# Altium PCB ISO-ASS[3]-VB-RC1.PcbDoc (part 2 of 3)
Units mm, origin at the board's own origin, x right, y up, seen from the top; angles counter-clockwise.
Board outline 300 x 85 mm, 4 copper layers (Top Layer, MidLayer1, MidLayer2, Bottom Layer); 157 components, 49 nets, 745 pads, 270 vias.
Unrouted connection lines stored in the file: 15.
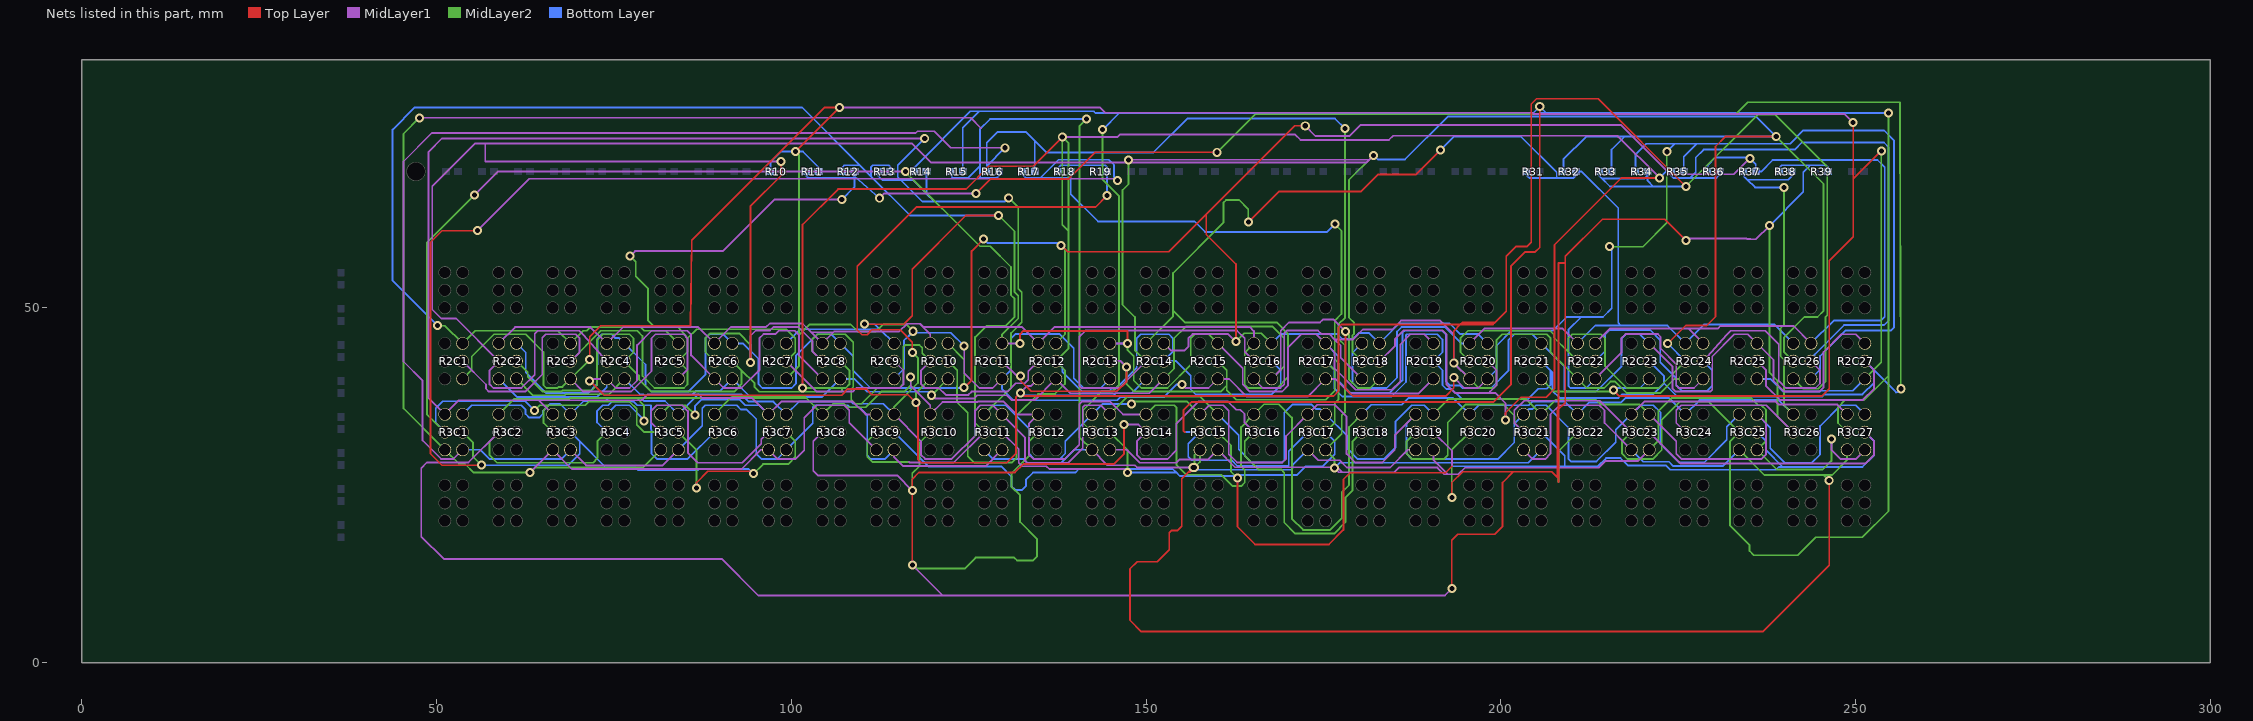
[diagram p4: the nets of this part, all layers, seen from the top]

## Via types
v1: diameter 1.27, hole 0.711, Top Layer to Bottom Layer, 270 vias

## Nets (pads, with @x,y where several pads share a name; then routed paths per layer and width w, separated by ;. In a path a pad name is that pad's centre, name@x,y a point inside that pad or via, vN(x,y) a via of type N, cw(c..) or ccw(c..) an arc to the next point about the centre after c; other vN are vias at no path point) (continued)
NetR2C1_4: R2C1.4 R2C3.4 R2C5.4 R2C7.4 R2C9.4 R2C11.4 R2C13.4 R2C15.4 R2C17.4 R2C19.4 R2C21.4 R2C23.4 R2C25.4 R2C27.4 R12.2 R13.2 | length 496.1
  Top Layer w0.254: v1(110.363,47.701) 115.849,47.701 117.069,48.92 117.069,55.474 124.638,63.043 v1(129.21,63.043) ; v1(132.258,45) 132.258,46.304 132.715,46.761 147.413,46.761 v1(147.413,45)
  MidLayer1 w0.254: R2C11.4@129.7,45 v1(132.258,45) ; R2C13.4@144.9,45 v1(147.413,45) ; R2C15.4@160.1,45 163.627,41.473 163.627,39.218 164.633,38.211 169.164,38.211 169.997,39.044 169.997,44.387 171.9,46.29 174.01,46.29 R2C17.4@175.3,45 176.581,43.719 176.581,41.462 179.578,38.465 184.658,38.465 185.815,39.622 185.815,44.845 187.251,46.281 189.219,46.281 R2C19.4@190.5,45 ; R2C23.4@220.9,45 224.206,41.694 224.206,38.633 224.638,38.202 229.514,38.202 229.794,38.481 229.794,43.157 232.918,46.281 234.819,46.281 R2C25.4@236.1,45 238.43,42.67 238.43,39.726 239.944,38.211 244.856,38.211 245.491,38.846 245.491,43.79 247.982,46.281 250.019,46.281 R2C27.4@251.3,45
  MidLayer2 w0.254: v1(50.19,47.494) 51.206,47.494 R2C1.4@53.7,45 55.489,46.789 67.111,46.789 R2C3.4@68.9,45 70.689,46.789 71.195,46.789 71.703,47.297 78.797,47.297 79.305,46.789 82.311,46.789 R2C5.4@84.1,45 ; v1(129.21,63.043) 131.489,60.764 131.489,52.222 131.997,51.714 131.997,48.506 129.7,46.208 R2C11.4@129.7,45 ; v1(147.413,45) 147.413,44.052 148.285,43.18 148.285,39.776 149.352,38.71 153.035,38.71 156.319,41.994 156.319,45.72 156.88,46.281 158.819,46.281 R2C15.4@160.1,45
  Bottom Layer w0.254: v1(50.19,47.494) 43.84,53.844 43.84,75.133 46.965,78.257 101.524,78.257 109.677,70.104 ; R2C7.4@99.3,45 101.29,46.99 110.363,46.99 112.51,46.99 ; R12.2@107.227,69.215 107.227,69.85 107.481,70.104 109.677,70.104 ; v1(110.363,47.701) 111.799,47.701 112.51,46.99 ; R13.2@114.007,69.215 114.007,69.85 113.753,70.104 111.495,70.104 111.241,69.85 111.241,68.54 ; v1(129.21,63.043) 116.738,63.043 ; R2C13.4@144.9,45 v1(147.413,45) ; R2C17.4@175.3,45 177.089,43.211 177.089,39.733 178.798,38.024 184.364,38.024 186.131,39.79 186.131,46.484 186.436,46.789 191.728,46.789 192.289,46.228 192.289,39.624 192.83,39.083 194.222,39.083 194.586,38.719 198.631,38.719 201.072,41.16 201.072,45.423 201.93,46.281 204.419,46.281 R2C21.4@205.7,45 208.991,41.709 208.991,38.506 209.296,38.202 213.411,38.202 217.018,41.808 217.018,45.72 217.602,46.304 219.596,46.304 R2C23.4@220.9,45 ; 109.677,70.104 111.241,68.54 ; 109.677,70.104 111.241,68.54 ; 111.241,68.54 116.738,63.043 ; 111.241,68.54 116.738,63.043 ; 111.241,68.54 116.738,63.043 ; 112.51,46.99 R2C9.4@114.5,45 112.51,46.99
NetR2C1_5: R2C1.5 R2C3.5 R2C5.5 R2C7.5 R2C9.5 R2C11.5 R2C13.5 R2C15.5 R2C17.5 R2C19.5 R2C21.5 R2C23.5 R2C25.5 R2C27.5 R11.1 R12.1 | length 582.7
  Top Layer w0.254: v1(126.06,66.142) 128.067,68.148 139.065,68.148 142.85,71.933 v1(160.02,71.933) ; v1(132.283,40.437) 132.283,39.776 133.807,38.252 145.898,38.252 147.269,39.624 v1(147.269,41.656)
  MidLayer1 w0.254: R2C1.5@53.7,42.5 56.998,39.202 56.998,38.608 57.395,38.211 62.52,38.211 64.922,40.613 64.922,45.796 65.407,46.281 69.62,46.281 70.181,45.72 70.181,43.781 R2C3.5@68.9,42.5 ; v1(77.292,57.302) 78.003,58.014 90.373,58.014 97.618,65.258 v1(107.129,65.258) ; R2C7.5@99.3,42.5 103.589,38.211 108.689,38.211 109.188,38.71 115.316,38.71 115.824,39.218 115.824,41.176 R2C9.5@114.5,42.5 ; v1(112.446,65.456) 113.132,66.142 v1(126.06,66.142) ; R2C11.5@129.7,42.5 131.763,40.437 v1(132.283,40.437) ; R2C13.5@144.9,42.5 146.425,42.5 v1(147.269,41.656) ; R2C25.5@236.1,42.5 237.388,41.212 237.388,38.989 239.344,37.033 251.028,37.033 252.603,38.608 252.603,41.197 R2C27.5@251.3,42.5
  MidLayer2 w0.254: R2C3.5@68.9,42.5 73.189,46.789 78.289,46.789 79.045,46.033 79.045,40.411 80.737,38.719 84.896,38.719 85.395,39.218 85.395,41.205 R2C5.5@84.1,42.5 85.395,43.795 85.395,45.72 ; v1(77.292,57.302) 78.105,56.49 78.105,54.483 79.807,52.781 79.807,48.26 80.77,47.297 84.072,47.297 85.395,45.72 ; R2C7.5@99.3,42.5 100.581,43.781 100.581,45.72 99.311,46.99 86.665,46.99 85.395,45.72 ; v1(147.269,41.656) 147.269,39.268 148.336,38.202 160.528,38.202 161.392,39.065 ; v1(160.02,71.933) 165.379,77.292 233.121,77.292 234.823,78.994 256.235,78.994 v1(256.362,38.608) ; R2C15.5@160.1,42.5 161.366,41.234 161.366,40.284 161.392,40.259 ; R2C17.5@175.3,42.5 176.606,41.194 176.606,38.354 175.311,37.059 162.73,37.059 161.392,38.397 161.392,39.065 ; 161.392,39.065 161.392,40.259 ; 161.392,39.065 161.392,40.259
  Bottom Layer w0.254: R11.1@102.147,69.215 102.147,68.58 102.401,68.326 108.673,68.326 108.927,68.58 ; v1(107.129,65.258) 108.927,67.056 108.927,68.58 ; v1(112.446,65.456) 108.927,68.58 ; R2C13.5@144.9,42.5 146.425,42.5 v1(147.269,41.656) ; R2C17.5@175.3,42.5 176.581,41.219 176.581,38.608 177.675,37.514 184.593,37.514 186.639,39.561 186.639,46.205 186.715,46.281 191.031,46.281 191.781,45.531 191.781,43.781 R2C19.5@190.5,42.5 191.781,41.219 191.781,39.116 192.34,38.557 193.116,38.557 194.539,37.135 203.784,37.135 205.257,38.608 206.477,38.608 206.985,39.116 206.985,41.215 ; R2C23.5@220.9,42.5 223.012,40.388 223.012,39.345 ; v1(256.362,38.608) 256.362,38.203 255.7,38.1 252.603,41.197 ; 108.927,68.58 R12.1@108.927,69.215 108.927,68.58 ; 206.985,41.215 R2C21.5@205.7,42.5 206.985,41.215 ; 206.985,41.215 207.264,40.936 207.264,38.329 208.28,37.313 216.586,37.313 217.094,37.821 221.488,37.821 223.012,39.345 ; 223.012,39.345 224.841,37.516 245.314,37.516 245.603,37.805 250.952,37.805 252.603,39.456 252.603,41.197 ; 252.603,41.197 R2C27.5@251.3,42.5 252.603,41.197
NetR2C1_6: R2C1.6 R2C3.6 R2C5.6 R2C7.6 R2C9.6 R2C11.6 R2C13.6 R2C15.6 R2C17.6 R2C19.6 R2C21.6 R2C23.6 R2C25.6 R2C27.6 R10.2 R11.2 | length 608.9
  Top Layer w0.254: v1(71.603,42.703) 71.603,45.923 73.152,47.473 85.827,47.473 85.979,59.538 104.673,78.232 v1(106.782,78.232) v1(100.584,72.034) ; v1(215.849,38.43) 216.713,37.567 245.237,37.567 246.278,38.608 246.278,56.642 249.657,60.02 ; v1(249.657,76.098) 249.657,68.174 ; v1(253.619,72.136) 249.657,68.174 ; 249.657,60.02 249.657,68.174 ; 249.657,60.02 249.657,68.174
  MidLayer1 w0.254: R2C3.6@68.9,40 70.698,38.202 77.426,38.202 80.319,41.094 80.319,45.72 80.88,46.281 84.836,46.281 85.381,45.736 85.381,41.281 R2C5.6@84.1,40 ; v1(106.782,78.232) 143.535,78.232 144.272,77.495 204.47,77.495 204.622,77.343 248.412,77.343 v1(249.657,76.098) ; v1(124.384,44.628) 124.384,40.818 126.492,38.71 128.41,38.71 R2C11.6@129.7,40 ; v1(155.067,39.218) 155.575,38.71 158.81,38.71 R2C15.6@160.1,40 161.695,40 164.193,37.502 172.802,37.502 R2C17.6@175.3,40 176.662,40 178.714,37.948 188.448,37.948 R2C19.6@190.5,40
  MidLayer2 w0.254: R2C1.6@53.7,40 54.991,41.291 54.991,43.155 58.117,46.281 62.586,46.281 65.1,43.766 65.1,39.116 65.507,38.71 67.069,38.71 67.221,38.862 67.762,38.862 R2C3.6@68.9,40 v1(71.603,42.703) ; R2C7.6@99.3,40 101.089,41.789 ; v1(100.584,72.034) 101.089,71.529 101.089,46.152 ; v1(117.17,46.711) 116.205,47.676 112.991,47.676 112,46.685 109.347,46.685 108.356,47.676 102.613,47.676 101.089,46.152 ; R2C21.6@205.7,40 207.489,38.211 215.63,38.211 v1(215.849,38.43) ; R2C27.6@251.3,40 253.619,42.319 v1(253.619,72.136) ; 101.089,41.789 101.089,46.152 ; 101.089,41.789 101.089,46.152
  Bottom Layer w0.254: R10.2@97.067,69.215 97.067,70.549 98.552,72.034 v1(100.584,72.034) 101.663,72.034 103.847,69.85 R11.2@103.847,69.215 ; R2C9.6@114.5,40 115.9,41.4 115.9,45.441 ; v1(117.17,46.711) 115.9,45.441 ; v1(124.384,44.628) 122.504,46.507 117.17,46.507 115.9,45.441 ; R2C13.6@144.9,40 143.61,38.71 141.224,38.71 139.827,40.107 139.827,44.331 137.854,46.304 131.572,46.304 130.988,45.72 130.988,41.288 R2C11.6@129.7,40 129.7,38.587 131.305,36.982 145.948,36.982 146.431,37.465 152.585,37.465 154.338,39.218 v1(155.067,39.218) ; v1(215.849,38.43) 216.129,38.71 219.61,38.71 R2C23.6@220.9,40 ; R2C25.6@236.1,40 237.978,40 239.776,38.202 244.932,38.202 245.044,38.313 249.613,38.313 R2C27.6@251.3,40
NetR2C2_1: R2C2.1 R2C4.1 R2C6.1 R2C8.1 R2C10.1 R2C12.1 R2C14.1 R2C16.1 R2C18.1 R2C20.1 R2C22.1 R2C24.1 R2C26.1 R31.1 R32.2 | length 385.1
  Top Layer w0.254: v1(164.414,62.078) 168.732,66.396 180.289,66.396 182.702,68.809 188.062,68.809 v1(191.491,72.238)
  MidLayer1 w0.254: R2C2.1@58.8,45 61.097,47.297 71.703,47.297 R2C4.1@74,45 76.297,47.297 86.903,47.297 R2C6.1@89.2,45 91.52,47.32 96.495,47.32 96.979,47.805 101.595,47.805 102.819,46.581 ; R2C10.1@119.6,45 119.6,46.262 118.085,47.777 ; R2C16.1@165.2,45 165.2,46.736 164.616,47.32 137.12,47.32 R2C12.1@134.8,45 132.48,47.32 118.618,47.32 118.161,47.777 118.085,47.777 ; R2C20.1@195.6,45 197.717,47.117 208.683,47.117 R2C22.1@210.8,45 ; 102.819,46.581 106.008,46.608 ; 102.819,46.581 R2C8.1@104.4,45 106.008,46.608 ; 106.008,46.608 115.24,46.685 ; 106.008,46.608 106.085,46.685 115.24,46.685 ; 115.24,46.685 116.332,47.777 ; 116.332,47.777 118.085,47.777 ; 116.332,47.777 118.085,47.777
  MidLayer2 w0.254: R2C14.1@150,45 153.822,48.822 153.822,49.581 ; v1(164.414,62.078) 164.414,63.932 163.144,65.202 161.29,65.202 160.909,64.821 160.909,62.001 153.822,54.915 ; R2C16.1@165.2,45 163.906,43.706 163.906,39.192 164.379,38.719 168.513,38.719 170.002,40.208 170.002,46.357 168.404,47.955 155.448,47.955 153.822,49.581 ; 153.822,49.581 153.822,54.915 ; 153.822,49.581 153.822,54.915
  Bottom Layer w0.254: R2C18.1@180.4,45 179.119,43.719 179.119,39.423 179.832,38.71 183.896,38.71 185.369,40.183 185.369,46.66 186.006,47.297 192.151,47.297 194.448,45 R2C20.1@195.6,45 ; v1(191.491,72.238) 193.37,74.117 202.844,74.117 207.874,69.088 207.874,68.326 ; R31.1@203.747,69.215 203.747,68.58 204.001,68.326 207.874,68.326 ; R2C22.1@210.8,45 213.323,47.523 216.916,47.523 ; R2C26.1@241.2,45 238.524,47.676 228.676,47.676 R2C24.1@226,45 223.477,47.523 ; 207.874,68.326 210.273,68.326 ; 207.874,68.326 210.273,68.326 ; 210.273,68.326 R32.2@210.527,69.215 ; 210.273,68.326 210.527,68.58 R32.2@210.527,69.215 ; R32.2@210.527,69.215 211.404,69.215 216.535,64.084 216.535,47.904 216.916,47.523 ; 216.916,47.523 223.477,47.523 ; 216.916,47.523 223.477,47.523
NetR2C2_2: R2C2.2 R2C4.2 R2C6.2 R2C8.2 R2C10.2 R2C12.2 R2C14.2 R2C16.2 R2C18.2 R2C20.2 R2C22.2 R2C24.2 R2C26.2 R32.1 R33.2 | length 818.5
  Top Layer w0.254: v1(94.259,42.291) 94.259,64.338 98.577,68.656 v1(98.577,70.612) ; v1(223.52,44.98) 226.063,47.523 229.006,47.523 230.251,48.768 230.251,72.746 231.648,74.143 v1(238.811,74.143)
  MidLayer1 w0.254: R2C4.2@74,42.5 70.689,46.228 70.128,46.789 64.266,46.789 63.856,46.379 63.856,40.589 61.985,38.719 58.004,38.719 57.506,39.218 57.506,41.206 R2C2.2@58.8,42.5 52.79,48.51 50.677,48.51 49.411,49.776 49.411,67.166 55.397,73.152 56.896,73.152 ; v1(94.259,42.291) 94.259,46.037 95.034,46.812 97.003,46.812 97.487,47.297 101.036,47.297 102.997,45.336 102.997,43.903 R2C8.2@104.4,42.5 ; v1(98.577,70.612) 56.896,70.612 56.896,73.152 ; R2C10.2@119.6,42.5 118.313,41.213 118.313,39.268 118.872,38.71 120.802,38.71 121.768,37.744 124.968,37.744 125.425,38.202 130.48,38.202 131.674,39.395 132.918,39.395 133.401,39.878 133.401,41.101 R2C12.2@134.8,42.5 ; v1(147.535,70.866) 181.432,70.866 ; R2C14.2@150,42.5 146.21,38.71 140.894,38.71 140.589,39.014 140.589,45.917 141.484,46.812 162.814,46.812 163.906,45.72 163.906,43.794 R2C16.2@165.2,42.5 ; 56.896,73.152 117.069,73.152 ; 56.896,73.152 117.069,73.152 ; 117.069,73.152 119.736,70.485 147.535,70.485 181.051,70.485 181.432,70.866 ; 181.432,70.866 v1(182.067,71.501) 181.432,70.866
  MidLayer2 w0.254: R2C6.2@89.2,42.5 87.909,43.791 87.909,45.72 88.595,46.406 92.685,46.406 94.259,44.831 v1(94.259,42.291) ; R2C8.2@104.4,42.5 102.921,43.979 102.921,45.491 103.71,46.281 107.62,46.281 108.745,45.156 108.745,38.856 108.458,38.569 108.458,37.084 109.042,36.5 109.906,36.5 112.125,38.719 115.224,38.719 115.799,39.294 115.799,44.501 116.053,44.755 118.085,44.755 118.466,44.374 118.466,43.634 R2C10.2@119.6,42.5 ; v1(147.535,70.866) 147.535,67.449 146.689,66.603 146.689,50.466 148.438,48.717 148.438,44.062 R2C14.2@150,42.5 ; R2C18.2@180.4,42.5 179.095,43.805 179.095,46.157 179.324,46.385 179.324,47.909 178.611,48.622 178.611,68.045 v1(182.067,71.501) ; R2C20.2@195.6,42.5 194.31,43.79 194.31,45.72 195.379,46.789 206.928,46.789 207.489,46.228 207.489,45.811 209.499,43.801 ; R2C24.2@226,42.5 222.219,38.719 217.743,38.719 214.681,41.781 214.681,45.72 214.12,46.281 210.06,46.281 209.499,45.72 209.499,43.801 ; v1(238.811,74.143) 245.491,67.462 245.491,49.581 244.627,48.717 242.773,48.717 239.919,45.863 239.919,43.781 R2C26.2@241.2,42.5 ; 209.499,43.801 R2C22.2@210.8,42.5 209.499,43.801
  Bottom Layer w0.254: v1(182.067,71.501) 182.651,70.917 186.487,70.917 192.532,76.962 235.991,76.962 v1(238.811,74.143) ; R32.1@208.827,69.215 208.827,70.924 212.046,74.143 217.424,74.143 ; R33.2@215.607,69.215 215.607,72.326 217.424,74.143 ; v1(223.52,44.98) R2C24.2@226,42.5 ; 217.424,74.143 v1(238.811,74.143) ; 217.424,74.143 v1(238.811,74.143)
NetR2C2_3: R2C2.3 R2C4.3 R2C6.3 R2C8.3 R2C10.3 R2C12.3 R2C14.3 R2C16.3 R2C18.3 R2C20.3 R2C22.3 R2C24.3 R2C26.3 R33.1 R34.2 | length 524.2
  Top Layer w0.254: v1(71.603,39.726) 73.635,37.694 107.112,37.694 108.001,38.583 110.566,38.583 111.379,37.77 116.459,37.77 ; v1(193.37,42.23) 193.37,46.736 194.31,47.676 ; v1(226.085,67.107) 213.716,79.477 205.029,79.477 204.292,78.74 204.292,59.258 203.708,58.674 202.184,58.674 200.762,57.252 200.762,49.555 ; 116.459,37.77 v1(117.577,36.652) ; 116.459,37.77 v1(117.577,36.652) ; v1(117.577,36.652) v1@117.856,36.373 ; v1(117.577,36.652) v1@117.856,36.373 ; v1@117.856,36.373 117.856,28.702 118.364,28.194 130.404,28.194 131.674,29.464 131.674,37.414 v1(132.283,38.024) 132.283,37.592 176.428,37.592 177.114,38.278 177.114,47.244 177.546,47.676 194.31,47.676 ; 194.31,47.676 194.564,47.93 199.136,47.93 ; 194.31,47.676 198.882,47.676 199.136,47.93 ; 199.136,47.93 200.762,49.555 ; 199.136,47.93 200.762,49.555
  MidLayer1 w0.254: v1(71.603,39.726) 71.877,40 R2C4.3@74,40 75.29,38.71 77.216,38.71 78.283,39.776 78.283,44.753 80.319,46.789 85.344,46.789 85.889,46.244 85.889,43.311 R2C6.3@89.2,40 90.49,38.71 92.989,38.71 95.519,41.239 95.519,45.72 96.103,46.304 97.753,46.304 98.238,46.789 100.528,46.789 101.089,46.228 101.089,43.311 R2C8.3@104.4,40 ; v1(132.283,38.024) 133.274,39.014 133.814,39.014 R2C12.3@134.8,40 ; R2C16.3@165.2,40 166.481,38.719 168.94,38.719 169.489,39.268 169.489,46.426 169.875,46.812 174.219,46.812 174.701,46.33 175.819,46.33 ; R2C18.3@180.4,40 177.444,42.956 177.444,44.704 176.606,45.542 ; R2C20.3@195.6,40 v1(193.37,42.23) 193.37,46.279 191.44,48.209 185.937,48.209 184.687,46.96 180.543,46.96 179.126,45.542 176.606,45.542 ; 175.819,46.33 176.606,45.542 ; 175.819,46.33 176.606,45.542
  MidLayer2 w0.254: v1(117.577,36.652) 117.577,37.977 R2C10.3@119.6,40 ; v1(193.37,42.23) R2C20.3@195.6,40 196.881,38.719 198.984,38.719 199.381,39.116 199.381,45.434 200.228,46.281 206.471,46.281 206.981,45.771 206.981,43.819 R2C22.3@210.8,40 212.081,38.719 214.554,38.719 215.459,39.624 216.119,39.624 217.713,38.031 222.509,38.031 224.478,40 R2C24.3@226,40 ; v1(226.085,67.107) 236.195,77.216 238.684,77.216 245.999,69.901 245.999,48.946 245.745,48.692 245.745,39.624 244.729,38.608 242.592,38.608 R2C26.3@241.2,40
  Bottom Layer w0.254: R2C2.3@58.8,40 61.348,37.452 72.648,37.452 74,38.804 R2C4.3@74,40 ; v1(132.283,38.024) 132.613,37.694 145.44,37.694 145.72,37.973 147.973,37.973 R2C14.3@150,40 ; R33.1@213.907,69.215 213.907,68.58 ; 213.907,68.58 214.237,68.25 ; 213.907,68.58 214.237,68.25 ; 214.237,68.25 220.243,68.25 220.687,68.693 ; 214.237,68.25 215.38,67.107 221.488,67.107 ; 220.687,68.693 R34.2@220.687,69.215 220.687,68.693 ; 220.687,68.693 220.687,67.908 221.488,67.107 ; 221.488,67.107 v1(226.085,67.107) 221.488,67.107
NetR2C2_4: R2C2.4 R2C4.4 R2C6.4 R2C8.4 R2C10.4 R2C12.4 R2C14.4 R2C16.4 R2C18.4 R2C20.4 R2C22.4 R2C24.4 R2C26.4 R36.1 R37.2 | length 466.1
  Top Layer w0.254: v1(124.384,38.76) 125.425,39.802 125.425,58.014 v1(127.127,59.715) ; v1(138.049,58.826) 138.963,57.912 153.197,57.912 158.496,63.211 ; v1(162.662,45.237) 162.662,56.185 158.496,60.35 158.496,63.211 ; v1(172.441,75.667) 170.951,75.667 ; 158.496,63.211 170.951,75.667 ; 158.496,63.211 170.951,75.667
  MidLayer1 w0.254: R2C14.4@152.5,45 153.482,44.018 155.448,44.018 155.981,44.552 155.981,45.72 156.566,46.304 161.595,46.304 v1(162.662,45.237) ; v1(172.441,75.667) 173.888,74.219 178.664,74.219 180.213,75.768 216.967,75.768 223.901,68.834 232.842,68.834 v1(235.09,71.082) ; R2C22.4@213.3,45 215.417,47.117 ; R2C24.4@228.5,45 226.383,47.117 ; R2C26.4@243.7,45 241.24,47.46 230.96,47.46 230.617,47.117 226.383,47.117 ; 215.417,47.117 226.383,47.117 ; 215.417,47.117 226.383,47.117
  MidLayer2 w0.254: R2C10.4@122.1,45 124.384,42.716 v1(124.384,38.76) ; R2C12.4@137.3,45 138.582,46.282 138.582,58.293 v1(138.049,58.826) ; v1(162.662,45.237) 163.855,46.431 166.269,46.431 R2C16.4@167.7,45
  Bottom Layer w0.254: R2C2.4@61.3,45 62.586,43.714 62.586,40.912 65.499,37.998 71.399,37.998 72.619,39.218 72.719,44.653 72.719,45.72 73.28,46.281 74.676,46.281 75.184,45.773 75.727,45.773 R2C4.4@76.5,45 79.477,42.023 79.477,39.04 80.315,38.202 85.522,38.202 87.919,40.599 87.919,45.72 88.48,46.281 90.419,46.281 R2C6.4@91.7,45 93.201,45 95.402,42.799 95.402,39.243 95.926,38.719 100.06,38.719 100.66,39.319 100.66,43.256 103.685,46.281 105.619,46.281 R2C8.4@106.9,45 108.737,43.163 108.737,41.148 111.176,38.71 124.333,38.71 v1(124.384,38.76) ; v1(127.127,59.715) 127.711,59.131 137.744,59.131 v1(138.049,58.826) ; R2C16.4@167.7,45 169.03,46.33 176.936,46.33 177.622,45.644 179.172,45.644 179.984,46.457 181.443,46.457 R2C18.4@182.9,45 185.705,47.805 192.79,47.805 194.291,46.304 196.796,46.304 R2C20.4@198.1,45 ; R36.1@229.147,69.215 229.147,70.104 230.239,71.196 234.975,71.196 v1(235.09,71.082) ; R2C26.4@243.7,45 246.911,48.211 253.536,48.211 254.093,48.768 254.093,69.833 253.086,70.841 238.303,70.841 236.677,69.215 R37.2@235.927,69.215 235.927,70.245 ; v1(235.09,71.082) 235.927,70.245 ; v1(235.09,71.082) 235.927,70.245
NetR2C2_5: R2C2.5 R2C4.5 R2C6.5 R2C8.5 R2C10.5 R2C12.5 R2C14.5 R2C16.5 R2C18.5 R2C20.5 R2C22.5 R2C24.5 R2C26.5 R35.1 R36.2 | length 618.4
  Top Layer w0.254: v1(101.597,38.719) 101.597,61.744 106.604,66.751 124.638,66.751 127.839,69.952 134.087,69.952 v1(138.201,74.066) ; v1(200.66,34.214) 200.66,35.23 202.844,37.414 206.375,37.414 207.569,38.608 207.569,58.893 217.002,68.326 v1(222.377,68.326)
  MidLayer1 w0.254: v1(138.201,74.066) 145.974,74.066 146.329,74.422 171.018,74.422 171.78,73.66 184.226,73.66 184.836,74.27 216.433,74.27 v1(222.377,68.326) ; R2C18.5@182.9,42.5 185.097,44.697 185.097,45.646 186.301,46.85 191.758,46.85 192.354,46.253 192.354,39.187 193.517,38.024 ; R2C20.5@198.1,42.5 199.39,41.21 199.39,39.116 198.476,38.202 198.476,38.024 ; v1(200.66,34.214) 200.66,36.576 199.212,38.024 198.476,38.024 ; R2C24.5@228.5,42.5 231.811,46.228 232.372,46.789 237.259,46.789 239.166,44.882 239.166,39.707 240.155,38.719 244.348,38.719 244.983,39.354 244.983,41.217 R2C26.5@243.7,42.5 ; 193.517,38.024 198.476,38.024 ; 193.517,38.024 198.476,38.024
  MidLayer2 w0.254: R2C2.5@61.3,42.5 62.89,40.91 62.89,40.31 64.999,38.202 67.589,38.202 67.742,38.354 71.857,38.354 72.619,39.116 72.619,45.441 73.459,46.281 77.22,46.281 77.781,45.72 77.781,43.781 R2C4.5@76.5,42.5 78.537,40.463 78.537,39.938 80.264,38.211 91.957,38.211 92.989,39.243 92.989,41.211 ; v1(101.597,38.719) 107.163,38.719 ; R2C8.5@106.9,42.5 108.204,41.196 108.204,39.218 107.705,38.719 ; R2C10.5@122.1,42.5 123.393,41.207 123.393,39.04 123.368,39.014 123.368,36.728 124.892,35.204 124.892,29.108 125.805,28.196 131.091,28.196 131.772,28.877 131.772,34.846 134.798,37.871 137.16,37.871 138.582,39.294 138.582,41.218 R2C12.5@137.3,42.5 139.09,44.29 ; 92.989,41.211 R2C6.5@91.7,42.5 92.989,41.211 ; 92.989,41.211 94.844,39.356 94.844,38.837 95.504,38.176 101.597,38.176 107.163,38.176 107.163,38.719 ; 107.163,38.719 107.705,38.719 ; 107.163,38.719 107.705,38.719 ; 139.09,44.29 139.09,60.808 ; 139.09,44.29 139.09,60.808 ; 139.09,60.808 139.09,73.177 v1(138.201,74.066) 138.201,61.697 139.09,60.808
  Bottom Layer w0.254: R2C12.5@137.3,42.5 138.252,41.548 138.252,40.963 141.014,38.202 144.755,38.202 145.212,38.659 145.796,38.659 148.692,41.554 148.692,45.72 149.253,46.281 153.236,46.281 153.797,45.72 153.797,43.797 R2C14.5@152.5,42.5 154.248,42.5 156.312,40.437 156.312,38.506 156.972,37.846 167.716,37.846 168.986,39.116 168.986,41.214 R2C16.5@167.7,42.5 ; R2C22.5@213.3,42.5 214.681,43.881 214.681,46.228 215.341,46.888 221.031,46.888 222.464,45.455 222.464,42.331 224.714,40.081 224.714,39.116 225.501,38.329 229.108,38.329 229.794,39.014 229.794,41.206 R2C24.5@228.5,42.5 ; v1(222.377,68.326) 223.266,69.215 R35.1@224.067,69.215 ; R36.2@230.847,69.215 230.847,68.783 230.39,68.326 226.695,68.326 ; R2C26.5@243.7,42.5 244.221,43.021 244.221,43.434 248.361,47.574 254,47.574 254.635,48.209 254.635,72.669 254,73.304 242.392,73.304 241.402,72.314 228.575,72.314 227.457,71.196 227.457,69.088 226.695,68.326 ; 224.067,68.592 R35.1@224.067,69.215 ; 224.067,68.592 224.067,68.566 224.307,68.326 224.333,68.326 ; 224.067,68.592 224.333,68.326 ; 224.067,68.592 R35.1@224.067,69.215 ; 224.333,68.326 226.695,68.326
NetR2C2_6: R2C2.6 R2C4.6 R2C6.6 R2C8.6 R2C10.6 R2C12.6 R2C14.6 R2C16.6 R2C18.6 R2C20.6 R2C22.6 R2C24.6 R2C26.6 R34.1 R35.2 | length 410.3
  Top Layer w0.254: v1(178.13,46.66) 178.13,38.608 179.172,37.567 192.227,37.567 193.37,38.71 v1(193.37,40.208)
  MidLayer1 w0.254: v1(119.794,37.694) 120.251,37.236 125.773,37.236 126.23,37.694 130.381,37.694 131.067,37.008 134.308,37.008 R2C12.6@137.3,40 139.327,37.973 150.473,37.973 R2C14.6@152.5,40 ; R2C16.6@167.7,40 168.981,41.281 168.981,46.787 170.149,47.955 174.523,47.955 174.93,48.362 176.428,48.362 v1(178.13,46.66) ; v1(193.37,40.208) 194.869,38.71 196.81,38.71 R2C20.6@198.1,40 ; R2C22.6@213.3,40 216.992,43.692 216.992,45.72 217.576,46.304 222.148,46.304 222.504,45.949 222.504,44.289 224.714,42.079 224.714,39.049 225.044,38.719 227.219,38.719 R2C24.6@228.5,40
  MidLayer2 w0.254: R2C2.6@61.3,40 63.606,37.694 68.089,37.694 68.242,37.846 74.346,37.846 R2C4.6@76.5,40 ; v1(119.794,37.694) R2C10.6@122.1,40 ; R2C14.6@152.5,40 153.949,41.449 153.949,45.72 155.6,47.371 167.843,47.371 169.494,45.72 169.494,41.794 R2C16.6@167.7,40 ; v1(178.13,46.66) 178.587,46.203 178.587,39.954 179.832,38.71 181.61,38.71 R2C18.6@182.9,40 ; v1(215.316,58.623) 220.04,58.623 223.393,61.976 v1(223.393,72.009)
  Bottom Layer w0.254: R2C4.6@76.5,40 78.695,37.805 79.194,37.805 79.305,37.694 86.017,37.694 86.637,38.313 90.013,38.313 R2C6.6@91.7,40 94.263,37.437 104.337,37.437 R2C8.6@106.9,40 108.869,40 110.693,38.176 119.311,38.176 v1(119.794,37.694) ; R2C20.6@198.1,40 199.39,41.29 199.39,44.681 201.498,46.789 207.34,46.789 209.268,48.717 211.328,48.717 ; R2C22.6@213.3,40 212.019,38.719 209.804,38.719 209.519,39.004 209.519,46.908 211.328,48.717 ; v1(215.316,58.623) 215.621,58.318 215.621,49.936 214.401,48.717 ; R34.1@218.987,69.215 218.987,71.642 220.472,73.127 224.511,73.127 ; v1(223.393,72.009) 224.511,73.127 ; R35.2@225.767,69.215 225.767,71.286 227.608,73.127 ; R2C26.6@243.7,40 244.981,41.281 244.981,43.211 248.608,46.838 255.016,46.838 255.397,47.219 255.397,73.609 254,75.006 242.646,75.006 240.767,73.127 ; 211.328,48.717 214.401,48.717 ; 211.328,48.717 214.401,48.717 ; 224.511,73.127 227.608,73.127 ; 224.511,73.127 227.608,73.127 ; 227.608,73.127 240.767,73.127 ; 227.608,73.127 240.767,73.127 ; 227.608,73.127 240.767,73.127
NetR3C1_1: R3C1.1 R3C3.1 R3C5.1 R3C7.1 R3C9.1 R3C11.1 R3C13.1 R3C15.1 R3C17.1 R3C19.1 R3C21.1 R3C23.1 R3C25.1 R3C27.1 R13.1 R14.1 | length 493.2
  MidLayer1 w0.254: R3C3.1@66.4,35 64.418,36.982 ; R3C9.1@112,35 110.491,35 108.687,36.805 98.605,36.805 R3C7.1@96.8,35 94.513,37.287 87.478,37.287 86.944,37.821 79.781,37.821 78.943,36.982 64.418,36.982 ; v1(118.821,73.889) 50.8,73.889 48.903,71.992 48.903,37.297 R3C1.1@51.2,35 53.182,36.982 ; R3C15.1@157.6,35 158.897,36.297 160.858,36.297 161.657,35.497 161.657,29.388 162.835,28.211 169.232,28.211 169.748,28.727 169.748,31.948 R3C17.1@172.8,35 174.147,36.347 176.581,36.347 178.261,34.667 178.261,29.431 179.481,28.211 183.278,28.211 185.044,29.977 185.044,32.044 R3C19.1@188,35 ; R3C23.1@218.4,35 220.205,36.805 238.76,36.805 239.192,36.373 247.427,36.373 R3C27.1@248.8,35 ; 53.182,36.982 64.418,36.982 ; 53.182,36.982 64.418,36.982
  MidLayer2 w0.254: R3C5.1@81.6,35 82.897,36.297 85.09,36.297 v1(86.462,34.925) ; R3C11.1@127.2,35 130.988,38.788 130.988,46.466 132.505,47.983 132.505,52.222 131.997,52.73 131.997,64.167 v1(130.658,65.507) ; v1(147.98,36.449) 148.336,36.805 155.795,36.805 R3C15.1@157.6,35
  Bottom Layer w0.254: v1(86.462,34.925) 86.462,36.195 87.317,37.051 92.747,37.051 93.502,36.297 95.503,36.297 R3C7.1@96.8,35 ; R13.1@112.307,69.215 112.307,68.58 112.861,68.026 115.438,68.026 ; v1(118.821,73.889) 115.011,70.079 115.011,68.453 115.438,68.026 ; R14.1@119.087,69.215 119.087,66.04 120.128,64.999 ; R3C11.1@127.2,35 128.497,36.297 130.215,36.297 133.477,33.035 133.477,29.511 134.286,28.702 137.846,28.702 138.627,29.483 138.627,31.227 R3C13.1@142.4,35 143.849,36.449 v1(147.98,36.449) ; v1(130.658,65.507) 130.15,64.999 ; R3C19.1@188,35 186.715,33.715 186.715,29.439 187.452,28.702 199.568,28.702 201.905,31.039 201.905,33.705 R3C21.1@203.2,35 203.938,35.738 204.419,35.738 204.962,36.281 206.391,36.281 209.519,33.153 209.519,28.736 209.883,28.372 213.483,28.372 216.205,31.093 216.205,32.805 R3C23.1@218.4,35 219.697,36.297 221.488,36.297 222.504,35.281 222.504,30.794 225.087,28.211 228.642,28.211 231.828,31.396 231.828,33.228 R3C25.1@233.6,35 ; 115.438,68.026 117.101,68.026 120.128,64.999 ; 115.438,68.026 118.466,64.999 120.128,64.999 ; 120.128,64.999 130.15,64.999 ; 120.128,64.999 130.15,64.999
NetR3C1_2: R3C1.2 R3C3.2 R3C5.2 R3C7.2 R3C9.2 R3C11.2 R3C13.2 R3C15.2 R3C17.2 R3C19.2 R3C21.2 R3C23.2 R3C25.2 R3C27.2 R14.2 R15.2 | length 922.5
  Top Layer w0.254: 155.485,32.5 155.27,32.715 155.27,35.56 156.464,36.754 199.009,36.754 201.422,39.167 201.422,55.88 203.428,57.886 204.861,57.886 205.486,58.51 v1(205.486,78.359)
  MidLayer1 w0.254: v1(55.397,65.938) 58.674,69.215 v1(116.078,69.215) ; R3C5.2@81.6,32.5 80.271,33.829 80.271,35.483 81.069,36.281 84.631,36.281 85.446,35.466 85.446,29.608 86.86,28.194 93.101,28.194 95.783,30.876 95.783,31.483 R3C7.2@96.8,32.5 ; 116.611,28.27 116.671,28.211 122.911,28.211 R3C11.2@127.2,32.5 ; R3C21.2@203.2,32.5 201.905,33.795 201.905,35.56 203.276,36.932 213.968,36.932 R3C23.2@218.4,32.5
  MidLayer2 w0.254: R3C1.2@51.2,32.5 48.666,35.034 48.666,59.207 v1(55.397,65.938) ; v1(63.805,35.56) 64.541,36.297 65.837,36.297 ; R3C3.2@66.4,32.5 65.1,33.8 65.1,35.56 65.837,36.297 ; R3C5.2@81.6,32.5 79.285,32.5 78.232,33.553 78.232,35.789 77.216,36.805 71.496,36.805 70.988,36.297 ; R3C9.2@112,32.5 110.719,31.219 110.719,29.032 111.481,28.27 116.611,28.27 ; v1(116.078,69.215) 126.605,58.688 128.052,58.688 130.981,55.76 130.981,51.789 131.489,51.281 131.489,48.768 130.219,47.498 127.533,47.498 125.919,45.884 125.919,33.781 R3C11.2@127.2,32.5 ; R3C13.2@142.4,32.5 141.119,33.781 141.119,35.56 143.79,38.231 145.296,38.231 146.181,39.116 146.181,65.782 143.891,68.072 v1(143.891,75.133) ; R3C19.2@188,32.5 186.719,31.219 186.719,29.452 187.452,28.719 192.041,28.719 192.532,29.21 192.532,33.858 195.071,36.398 200.33,36.398 201.93,34.798 201.93,33.77 R3C21.2@203.2,32.5 ; R3C23.2@218.4,32.5 217.094,31.194 217.094,29.464 217.856,28.702 221.414,28.702 222.689,29.977 222.689,34.251 225.227,36.789 229.311,36.789 R3C25.2@233.6,32.5 232.308,31.208 232.308,19.304 235.052,16.561 235.052,15.748 235.661,15.138 241.859,15.138 244.399,17.678 250.952,17.678 254.635,21.361 254.635,40.437 ; R3C27.2@248.8,32.5 247.519,33.781 247.519,36.013 248.488,36.982 251.181,36.982 254.635,40.437 ; 65.837,36.297 70.988,36.297 ; 65.837,36.297 70.988,36.297 ; 254.635,40.437 v1(254.635,77.47) 254.635,40.437
  Bottom Layer w0.254: R3C1.2@51.2,32.5 49.911,33.789 49.911,35.865 50.902,36.855 62.509,36.855 v1(63.805,35.56) ; v1(116.078,69.215) R14.2@117.387,69.215 117.387,69.85 125.261,77.724 126.529,77.724 ; R15.2@124.167,69.215 124.167,75.362 126.529,77.724 ; v1(143.891,75.133) 146.228,77.47 ; 155.485,32.5 R3C15.2@157.6,32.5 155.951,30.851 155.951,29.037 156.464,28.524 162.069,28.524 162.89,27.703 170.066,27.703 170.106,27.743 170.106,29.806 R3C17.2@172.8,32.5 ; 126.529,77.724 142.621,77.724 ; 126.529,77.724 142.621,77.724 ; 142.621,77.724 142.875,77.47 146.228,77.47 ; 146.228,77.47 204.597,77.47 ; 146.228,77.47 204.597,77.47 ; 204.597,77.47 v1(205.486,78.359) ; v1(205.486,78.359) 206.375,77.47 ; v1(205.486,78.359) 205.486,77.47 206.375,77.47 ; 206.375,77.47 v1(254.635,77.47) 206.375,77.47
NetR3C1_3: R3C1.3 R3C3.3 R3C5.3 R3C7.3 R3C9.3 R3C11.3 R3C13.3 R3C15.3 R3C17.3 R3C19.3 R3C21.3 R3C23.3 R3C25.3 R3C27.3 R15.1 R16.1 | length 600.3
  Top Layer w0.254: v1(156.616,27.508) 155.956,26.848 ; v1(156.82,27.508) 156.718,27.407 156.159,26.848 155.956,26.848 ; v1(246.278,25.679) 246.278,13.741 236.931,4.394 149.352,4.394 147.726,6.02 147.726,13.208 148.742,14.224 151.613,14.224 153.289,15.9 153.289,18.339 153.568,18.618 154.432,18.618 155.042,19.228 155.042,25.933 ; 155.042,25.933 155.956,26.848 ; 155.042,25.933 155.956,26.848
  MidLayer1 w0.254: v1(47.6,76.784) 125.298,76.784 126.746,75.336 ; v1(63.189,26.789) R3C3.3@66.4,30 69.103,27.297 93.007,27.297 95.71,30 R3C7.3@96.8,30 98.098,28.702 100.584,28.702 101.854,29.972 101.854,34.519 103.616,36.281 107.46,36.281 108.181,35.56 108.181,33.819 R3C9.3@112,30 ; R3C13.3@142.4,30 144.562,27.838 148.412,27.838 148.742,27.508 v1(156.616,27.508) v1(156.82,27.508) ; R3C17.3@172.8,30 174.276,28.524 177.292,28.524 178.308,27.508 184.404,27.508 186.896,30 R3C19.3@188,30 ; R3C21.3@203.2,30 204.497,28.703 206.249,28.703 206.985,29.439 206.985,34.986 208.28,36.281 213.884,36.281 214.605,35.56 214.605,33.795 R3C23.3@218.4,30
  MidLayer2 w0.254: v1(47.6,76.784) 45.364,74.549 45.364,35.836 R3C1.3@51.2,30 53.197,28.003 54.038,28.003 55.252,26.789 v1(63.189,26.789) 63.895,27.495 79.095,27.495 R3C5.3@81.6,30 ; v1(141.605,76.606) 140.611,75.612 140.611,31.789 R3C13.3@142.4,30 ; R3C25.3@233.6,30 237.159,26.441 ; v1(246.278,25.679) 245.516,26.441 ; R3C27.3@248.8,30 248.8,28.578 246.663,26.441 246.278,26.441 245.516,26.441 ; 237.159,26.441 245.516,26.441 ; 237.159,26.441 245.516,26.441 ; v1(156.82,27.508) 156.82,29.22 R3C15.3@157.6,30 157.6,28.289 v1(156.82,27.508)
  Bottom Layer w0.254: R15.1@122.467,69.215 122.721,68.326 124.968,68.326 126.594,69.952 ; 126.746,75.336 128.016,76.606 ; R3C11.3@127.2,30 128.498,28.702 132.766,28.702 133.274,28.194 138.056,28.194 139.862,30 R3C13.3@142.4,30 ; R16.1@129.247,69.215 129.247,68.58 128.993,68.326 126.594,68.326 126.594,69.952 ; v1(141.605,76.606) 128.016,76.606 ; v1(156.616,27.508) 156.718,27.407 156.93,27.195 170.434,27.195 170.688,27.449 170.688,27.888 R3C17.3@172.8,30 ; R3C23.3@218.4,30 220.079,28.321 223.703,28.321 224.321,27.703 231.303,27.703 R3C25.3@233.6,30 ; 126.594,69.952 126.594,75.184 ; 126.594,69.952 126.594,75.184 ; 126.594,75.184 128.016,76.606
NetR3C1_4: R3C1.4 R3C3.4 R3C5.4 R3C7.4 R3C9.4 R3C11.4 R3C13.4 R3C15.4 R3C17.4 R3C19.4 R3C21.4 R3C23.4 R3C25.4 R3C27.4 R18.2 R19.2 | length 357.9
  Top Layer w0.254: v1(117.069,43.739) 117.069,45.187 115.341,46.914 111.379,46.914 110.693,46.228 109.982,46.228 109.322,46.888 109.322,55.88 117.653,64.211 142.887,64.211 v1(144.487,65.811)
  MidLayer1 w0.254: R3C9.4@114.5,35 118.279,31.221 118.279,29.312 118.872,28.719 122.64,28.719 125.919,31.998 125.919,35.531 126.669,36.281 128.419,36.281 R3C11.4@129.7,35 132.969,31.731 132.969,28.448 133.223,28.194 139.072,28.194 141.097,30.219 141.097,36.015 141.379,36.297 143.603,36.297 R3C13.4@144.9,35 ; R3C23.4@220.9,35 224.714,31.186 224.714,29.464 225.476,28.702 236.728,28.702 237.388,29.362 237.388,33.712 R3C25.4@236.1,35
  MidLayer2 w0.254: R3C9.4@114.5,35 114.5,36.068 117.856,39.424 117.856,42.951 v1(117.069,43.739) ; R3C13.4@144.9,35 147.371,37.471 157.629,37.471 R3C15.4@160.1,35 ; R3C19.4@190.5,35 192.686,37.186 203.514,37.186 R3C21.4@205.7,35 207.768,37.068 213.376,37.068 214.046,36.398 219.502,36.398 R3C23.4@220.9,35
  Bottom Layer w0.254: R3C1.4@53.7,35 54.981,36.281 61.976,36.281 62.581,35.676 62.581,35.052 63.089,34.544 64.491,34.544 64.999,35.052 64.999,35.433 66.04,36.474 67.426,36.474 R3C3.4@68.9,35 70.781,36.881 73.787,36.881 74.203,37.297 78.797,37.297 79.213,36.881 82.219,36.881 R3C5.4@84.1,35 86.905,37.805 92.998,37.805 93.998,36.805 97.495,36.805 R3C7.4@99.3,35 101.105,36.805 108.458,36.805 108.763,36.5 113,36.5 R3C9.4@114.5,35 ; R18.2@137.707,69.215 137.707,69.85 137.961,70.104 144.247,70.104 144.487,69.864 R19.2@144.487,69.215 v1(144.487,65.811) ; R3C15.4@160.1,35 163.072,32.028 163.072,30.069 164.931,28.211 169.156,28.211 169.489,28.544 169.489,35.199 170.688,36.398 173.297,36.398 173.939,35.756 174.544,35.756 R3C17.4@175.3,35 178.41,31.89 178.41,30.124 179.832,28.702 183.49,28.702 185.166,30.378 185.166,34.007 187.44,36.281 189.219,36.281 R3C19.4@190.5,35 ; R3C25.4@236.1,35 237.973,33.127 237.973,30.219 239.997,28.194 243.84,28.194 244.983,29.337 244.983,33.35 247.914,36.281 250.019,36.281 R3C27.4@251.3,35
NetR3C1_5: R3C1.5 R3C3.5 R3C5.5 R3C7.5 R3C9.5 R3C11.5 R3C13.5 R3C15.5 R3C17.5 R3C19.5 R3C21.5 R3C23.5 R3C25.5 R3C27.5 R17.1 R18.1 | length 619.4
  Top Layer w0.254: v1(55.789,60.884) 50.8,60.884 49.174,59.258 49.174,29.464 50.8,27.838 v1(56.363,27.838) ; v1(86.665,24.613) 86.665,25.4 88.24,26.975 94.351,26.975 v1(94.686,26.64) ; v1(162.89,26.01) 162.89,19.152 165.379,16.662 175.768,16.662 177.825,18.72 177.825,25.825 178.772,26.772 192.202,26.772 193.116,27.686
  MidLayer1 w0.254: v1(55.789,60.884) 63.104,68.199 145.745,68.199 v1(145.999,67.945) ; R3C11.5@129.7,32.5 132.08,30.12 132.08,28.194 132.588,27.686 135.966,27.686 136.355,27.297 146.922,27.297 v1(147.396,26.822) ; R3C19.5@190.5,32.5 193.116,29.884 193.116,27.686 ; R3C23.5@220.9,32.5 225.333,28.067 251.333,28.067 252.603,29.337 252.603,31.197 R3C27.5@251.3,32.5
  MidLayer2 w0.254: R3C1.5@53.7,32.5 55.143,31.057 55.143,29.058 v1(56.363,27.838) ; R3C5.5@84.1,32.5 86.665,29.935 v1(86.665,24.613) ; v1(94.686,26.64) 96.037,27.991 99.568,27.991 100.584,29.007 100.584,31.216 R3C7.5@99.3,32.5 ; R3C13.5@144.9,32.5 147.396,30.004 v1(147.396,26.822) ; R3C15.5@160.1,32.5 161.976,30.624 161.976,26.924 v1(162.89,26.01) ; R3C17.5@175.3,32.5 176.606,33.806 176.606,36.551 177.114,37.059 177.114,42.283 176.601,42.796 176.601,48.204 177.546,49.149 177.546,60.858 v1(176.606,61.798)
  Bottom Layer w0.254: v1(56.363,27.838) 68.58,27.838 70.206,29.464 70.206,31.194 ; v1(94.686,26.64) 94.029,27.297 87.022,27.297 86.903,27.178 78.41,27.178 78.08,27.508 73.892,27.508 70.206,31.194 ; R3C9.5@114.5,32.5 119.339,27.661 129.616,27.661 131.039,26.238 131.039,24.892 131.572,24.359 132.537,24.359 133.071,24.892 133.071,25.787 134.081,26.797 140.045,26.797 140.553,27.305 147.396,27.305 153.773,27.305 154.256,26.822 ; R17.1@132.627,69.215 132.627,68.77 133.071,68.326 ; v1(145.999,67.945) 145.491,68.453 145.491,70.155 144.78,70.866 137.668,70.866 135.128,68.326 ; v1(147.396,26.822) 154.256,26.822 ; R3C17.5@175.3,32.5 176.606,31.194 176.606,29.362 174.904,27.661 172.517,27.661 171.323,26.467 163.347,26.467 v1(162.89,26.01) 162.585,26.314 154.764,26.314 ; v1(176.606,61.798) 175.514,60.706 158.318,60.706 156.845,62.179 143.256,62.179 139.407,66.028 139.407,68.58 ; 193.116,27.686 209.011,27.686 ; R3C21.5@205.7,32.5 209.011,29.189 209.011,27.686 ; R3C25.5@236.1,32.5 237.388,31.212 237.388,29.921 239.725,27.584 ; R3C27.5@251.3,32.5 252.603,31.197 252.603,29.235 250.952,27.584 ; 70.206,31.194 R3C3.5@68.9,32.5 70.206,31.194 ; 133.071,68.326 135.128,68.326 ; 133.071,68.326 135.128,68.326 ; 135.128,68.326 139.153,68.326 139.407,68.58 ; 139.407,68.58 R18.1@139.407,69.215 139.407,68.58 ; 154.256,26.822 154.764,26.314 ; 154.256,26.822 154.764,26.314 ; 209.011,27.686 213.687,27.686 ; 209.011,27.686 213.687,27.686 ; 213.687,27.686 214.83,28.829 216.865,28.829 217.884,27.81 223.267,27.81 223.882,27.195 238.801,27.195 239.19,27.584 239.725,27.584 ; 239.725,27.584 250.952,27.584 ; 239.725,27.584 250.952,27.584
NetR3C1_6: R3C1.6 R3C3.6 R3C5.6 R3C7.6 R3C9.6 R3C11.6 R3C13.6 R3C15.6 R3C17.6 R3C19.6 R3C21.6 R3C23.6 R3C25.6 R3C27.6 R16.2 R17.2 | length 534.6
  MidLayer1 w0.254: R3C1.6@53.7,30 52.419,28.719 50.656,28.719 48.057,31.318 48.057,39.751 45.364,42.443 45.364,70.637 49.378,74.651 117.551,74.651 117.805,74.905 120.142,74.905 122.479,72.568 v1(130.124,72.568) ; R3C3.6@68.9,30 71.095,27.805 81.905,27.805 R3C5.6@84.1,30 ; R3C9.6@114.5,30 114.5,28.985 115.782,27.703 127.403,27.703 R3C11.6@129.7,30 ; R3C13.6@144.9,30 147.267,30 149.098,28.169 154.247,28.169 154.704,28.626 158.726,28.626 R3C15.6@160.1,30 162.541,27.559 176.555,27.559 176.936,27.559 177.652,26.844 ; v1(176.555,27.432) 177.144,26.844 177.652,26.844 ; R3C19.6@190.5,30 190.5,28.6 192.532,26.568 ; R3C23.6@220.9,30 219.348,28.448 214.769,28.448 213.806,27.486 194.948,27.486 194.031,26.568 ; v1(246.583,31.496) 246.583,30.023 247.904,28.702 250.002,28.702 R3C27.6@251.3,30 ; 177.652,26.844 184.956,26.844 ; 177.652,26.844 184.956,26.844 ; 184.956,26.844 185.608,27.495 191.063,27.495 191.99,26.568 192.532,26.568 ; 192.532,26.568 194.031,26.568 ; 192.532,26.568 194.031,26.568
  MidLayer2 w0.254: v1(176.555,27.432) 176.555,28.745 R3C17.6@175.3,30 177.595,32.295 177.595,34.853 178.054,35.312 178.054,44.704 177.114,45.644 177.114,47.681 178.054,48.62 v1(178.054,75.26) ; R3C23.6@220.9,30 222.181,31.281 222.181,35.466 224.012,37.297 235.27,37.297 236.296,36.271 236.728,36.271 237.381,35.618 237.381,31.281 R3C25.6@236.1,30 238.871,27.229 245.364,27.229 246.583,28.448 v1(246.583,31.496)
  Bottom Layer w0.254: R3C1.6@53.7,30 56.208,30 57.506,28.702 67.602,28.702 R3C3.6@68.9,30 ; R3C5.6@84.1,30 87.482,33.382 87.482,35.879 87.9,36.297 92.317,36.297 92.934,35.679 93.734,35.679 95.072,34.341 95.072,29.464 95.834,28.702 98.002,28.702 R3C7.6@99.3,30 103.048,33.748 103.048,36.005 103.34,36.297 107.95,36.297 108.255,35.992 109.601,35.992 110.719,34.874 110.719,29.235 111.252,28.702 113.202,28.702 R3C9.6@114.5,30 ; v1(130.124,72.568) 127.547,69.991 ; R17.2@134.327,69.215 134.327,73.547 ; v1(176.555,27.432) 177.317,28.194 203.894,28.194 R3C21.6@205.7,30 ; v1(178.054,75.26) 176.632,76.683 155.829,76.683 151.054,71.907 135.966,71.907 134.327,73.547 ; 127.547,69.991 127.547,73.293 129.032,74.778 133.096,74.778 ; 127.547,69.991 R16.2@127.547,69.215 127.547,69.991 ; 133.096,74.778 134.327,73.547 ; 133.096,74.778 134.327,73.547
NetR3C2_1: R3C2.1 R3C4.1 R3C6.1 R3C8.1 R3C10.1 R3C12.1 R3C14.1 R3C16.1 R3C18.1 R3C20.1 R3C22.1 R3C24.1 R3C26.1 R37.1 R38.2 | length 349.1
  MidLayer1 w0.254: v1(116.84,40.234) 116.84,39.014 119.6,36.254 R3C10.1@119.6,35 121.328,36.728 126.205,36.728 126.281,36.805 129.946,36.805 131.751,35 R3C12.1@134.8,35 133.502,33.702 133.502,29.329 134.112,28.719 138.581,28.719 140.589,30.727 140.589,36.424 140.97,36.805 144.958,36.805 146.762,35 R3C14.1@150,35
  MidLayer2 w0.254: R3C2.1@58.8,35 60.986,37.186 68.758,37.186 68.885,37.313 ; v1(79.248,34.061) 79.248,36.297 78.232,37.313 ; R3C6.1@89.2,35 91.513,37.313 ; v1(116.84,40.234) 116.84,39.126 115.925,38.211 112.709,38.211 110.49,35.992 107.95,35.992 107.442,36.5 105.9,36.5 R3C8.1@104.4,35 ; R3C14.1@150,35 151.297,36.297 153.975,36.297 154.289,35.982 154.289,27.875 155.672,26.492 160.63,26.492 162.23,24.892 163.398,24.892 163.906,25.4 163.906,27.153 163.398,27.661 163.398,33.198 R3C16.1@165.2,35 166.624,36.424 168.678,36.424 170.557,34.544 170.557,20.299 172.137,18.719 175.945,18.719 177.595,20.369 177.595,24.013 178.611,25.029 178.611,33.211 R3C18.1@180.4,35 ; v1(239.903,66.98) 239.903,47.588 239.411,47.096 239.411,43.211 239.903,42.719 239.903,36.297 R3C26.1@241.2,35 ; 68.885,37.313 78.232,37.313 ; 68.885,37.313 78.232,37.313 ; 78.232,37.313 91.513,37.313 ; 91.513,37.313 102.087,37.313 ; 91.513,37.313 91.741,37.541 101.859,37.541 102.087,37.313 ; 102.087,37.313 R3C8.1@104.4,35 ; 102.087,37.313 R3C8.1@104.4,35
  Bottom Layer w0.254: R3C4.1@74,35 75.281,36.281 77.216,36.281 79.248,34.249 v1(79.248,34.061) ; R3C18.1@180.4,35 181.747,36.347 186.029,36.347 186.979,37.297 193.303,37.297 R3C20.1@195.6,35 196.897,36.297 203.911,36.297 204.403,36.789 209.011,36.789 R3C22.1@210.8,35 212.478,36.678 216.982,36.678 217.617,37.313 223.687,37.313 R3C24.1@226,35 228.008,37.008 239.192,37.008 R3C26.1@241.2,35 ; R37.1@234.227,69.215 234.227,68.58 ; v1(239.903,66.98) 235.827,66.98 234.735,68.072 ; R38.2@241.007,69.215 241.007,68.58 240.499,68.072 234.735,68.072 ; 234.227,68.58 234.735,68.072 ; 234.227,68.58 234.735,68.072
NetR3C2_2: R3C2.2 R3C4.2 R3C6.2 R3C8.2 R3C10.2 R3C12.2 R3C14.2 R3C16.2 R3C18.2 R3C20.2 R3C22.2 R3C24.2 R3C26.2 R38.1 R39.2 | length 741.3
  Top Layer w0.254: v1(146.914,33.553) 146.914,29.464 145.44,27.991 132.69,27.991 131.521,26.822 118.008,26.822 117.069,25.883 v1(117.069,24.257) ; v1(193.091,10.439) 193.091,17.272 193.929,18.11 199.136,18.11 200.254,19.228 200.254,25.4 201.778,26.924 ; v1(193.091,23.292) 193.091,25.4 194.615,26.924 201.778,26.924 ; 208.128,25.425 208.128,35.712 ; v1(226.085,59.512) 223.09,62.508 214.324,62.508 209.067,57.252 ; v1(117.069,24.257) v1(117.069,13.767) v1(117.069,24.257) ; 201.778,26.924 207.188,26.924 ; 201.778,26.924 207.188,26.924 ; 207.188,26.924 207.95,26.162 207.95,35.535 208.128,35.712 ; 208.128,35.712 209.067,36.652 209.067,56.312 ; 208.128,35.712 208.128,56.312 209.067,56.312 ; 209.067,56.312 209.067,57.252 ; 209.067,56.312 209.067,57.252
  MidLayer1 w0.254: R3C2.2@58.8,32.5 54.511,28.211 48.658,28.211 47.879,27.432 47.879,17.78 51.029,14.63 90.195,14.63 95.352,9.474 121.361,9.474 ; R3C8.2@104.4,32.5 103.099,31.199 103.099,27.051 103.759,26.391 114.935,26.391 v1(117.069,24.257) ; v1(117.069,13.767) 121.361,9.474 ; v1(146.914,33.553) 148.947,33.553 R3C14.2@150,32.5 148.717,31.217 148.717,29.337 149.352,28.702 153.035,28.702 154.254,29.921 154.254,33.696 157.362,36.805 161.554,36.805 162.716,35.643 163.303,35.643 163.894,35.052 163.894,33.806 R3C16.2@165.2,32.5 ; v1(193.091,10.439) 192.126,9.474 ; R3C24.2@226,32.5 224.714,33.786 224.714,35.56 225.45,36.297 237.403,36.297 R3C26.2@241.2,32.5 ; v1(226.085,59.512) 226.365,59.792 234.594,59.792 ; v1(237.871,61.595) 235.941,59.665 ; 121.361,9.474 192.126,9.474 ; 121.361,9.474 192.126,9.474 ; 234.594,59.792 234.721,59.665 235.941,59.665 ; 234.594,59.792 235.941,59.665
  MidLayer2 w0.254: R3C2.2@58.8,32.5 57.506,31.206 57.506,29.235 58.547,28.194 72.085,28.194 72.695,28.804 72.695,31.195 R3C4.2@74,32.5 ; v1(117.069,13.767) 117.577,13.259 124.435,13.259 125.984,14.808 131.445,14.808 131.826,14.427 134.112,14.427 134.62,14.935 134.62,17.468 132.258,19.83 132.258,23.597 131.039,24.816 131.039,26.67 133.519,29.15 133.519,31.219 R3C12.2@134.8,32.5 ; v1(117.069,24.257) 117.069,26.695 118.085,27.711 118.085,30.985 R3C10.2@119.6,32.5 ; R3C16.2@165.2,32.5 163.919,31.219 163.919,29.172 165.846,27.245 169.033,27.245 169.489,26.789 169.489,19.766 171.057,18.199 176.517,18.199 178.103,19.785 178.103,23.273 179.119,24.289 179.119,31.219 R3C18.2@180.4,32.5 ; v1(193.091,23.292) 193.091,29.991 R3C20.2@195.6,32.5 ; 208.128,25.425 208.128,29.828 R3C22.2@210.8,32.5 ; v1(237.871,61.595) 237.871,40.869 238.989,39.751 238.989,34.711 R3C26.2@241.2,32.5
  Bottom Layer w0.254: R3C4.2@74,32.5 72.644,33.856 72.644,35.484 73.457,36.297 74.218,36.297 74.711,36.789 77.797,36.789 78.289,36.297 80.264,36.297 80.315,29.464 81.06,28.719 85.419,28.719 R3C6.2@89.2,32.5 ; v1(237.871,61.595) 242.621,66.345 242.621,69.088 243.637,70.104 ; R38.1@239.307,69.215 239.307,69.85 239.561,70.104 243.637,70.104 ; 243.637,70.104 245.833,70.104 ; 243.637,70.104 245.833,70.104 ; 245.833,70.104 246.087,69.85 R39.2@246.087,69.215 245.833,70.104